# EAGLE board PGA44DIP44 (EAGLE 8.1.1)
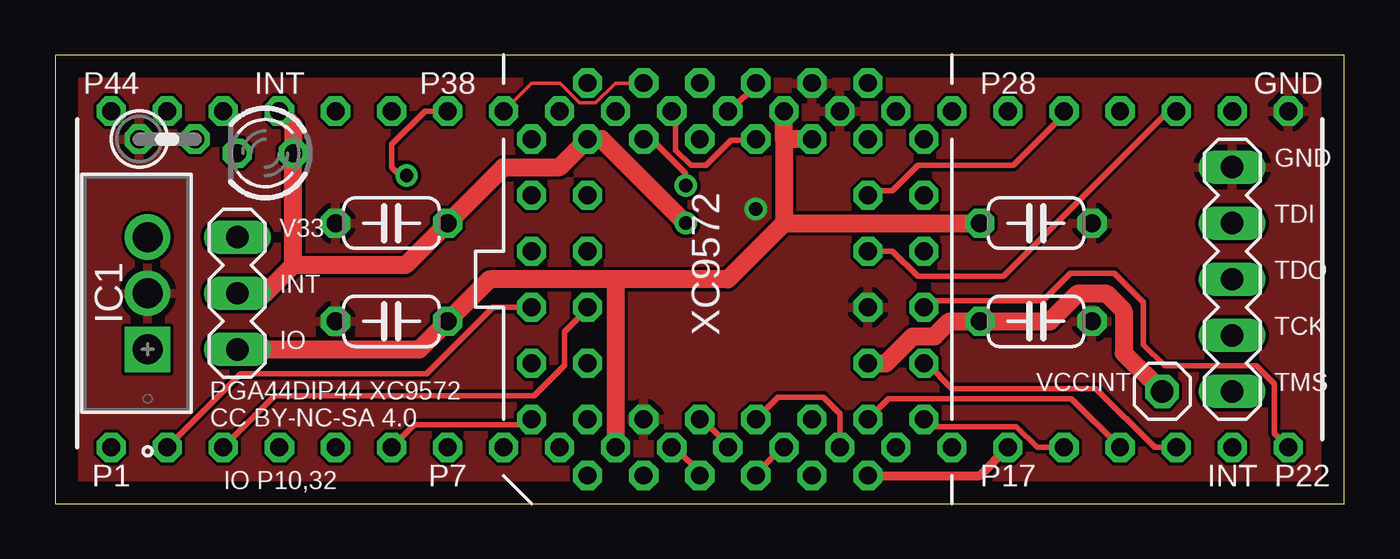
[diagram p0: board, top side]
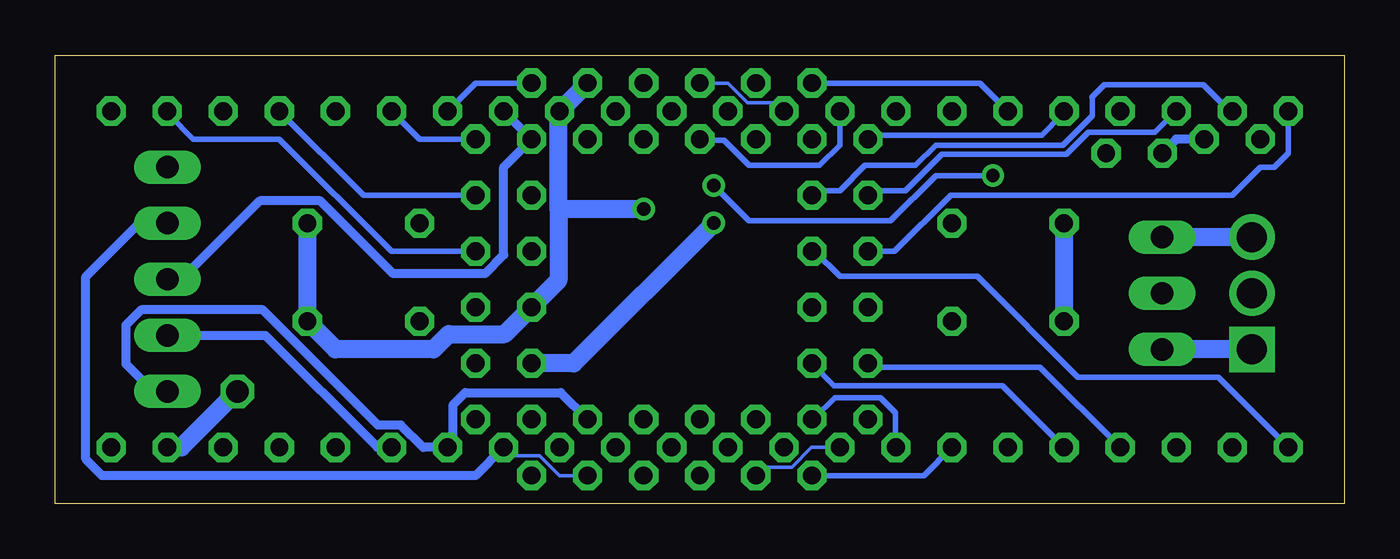
[diagram p1: board, bottom side, seen from below]

Size 58.42 x 20.31 mm. Coordinates in mm from the lower left corner, seen from the top.
Outline: 0,0 58.42,0 58.42,20.31 0,20.31 0,0
Copper layers (1*16): Top 0.035mm / dielectric 1.5mm / Bottom 0.035mm
Design rules "default *": minimum track width 6mil, minimum drill 24mil, track to track 6mil, track to pad 6mil, pad to pad 6mil, via to via 6mil, smd to smd 8mil, copper to edge 40mil, drill to drill 8mil, minimum pad ring 10mil, minimum via ring 8mil, stop-mask expansion 4mil, vias tented up to drill 0mil, thermal gap 10mil

## Footprints (pad centres in the part's own frame; a part is rotated, then mirrored left to right if it is on the bottom)
C050-024X044 = drill 0.813 octagon: 1 -2.54,0; 2 2.54,0
MA05-1 = drill 1.016 long: 1 -5.08,0; 2 -2.54,0; 3 0,0; 4 2.54,0; 5 5.08,0
DIP44 = drill 0.813 octagon: 1 -26.67,-8.89; 2 -24.13,-8.89; 3 -21.59,-8.89; 4 -19.05,-8.89; 5 -16.51,-8.89; 6 -13.97,-8.89; 7 -11.43,-8.89; 8 -8.89,-8.89; 9 -6.35,-8.89; 10 -3.81,-8.89; 11 -1.27,-8.89; 12 1.27,-8.89; 13 3.81,-8.89; 14 6.35,-8.89; 15 8.89,-8.89; 16 11.43,-8.89; 17 13.97,-8.89; 18 16.51,-8.89; 19 19.05,-8.89; 20 21.59,-8.89; 21 24.13,-8.89; 22 26.67,-8.89; 23 26.67,6.35; 24 24.13,6.35; 25 21.59,6.35; 26 19.05,6.35; 27 16.51,6.35; 28 13.97,6.35; 29 11.43,6.35; 30 8.89,6.35; 31 6.35,6.35; 32 3.81,6.35; 33 1.27,6.35; 34 -1.27,6.35; 35 -3.81,6.35; 36 -6.35,6.35; 37 -8.89,6.35; 38 -11.43,6.35; 39 -13.97,6.35; 40 -16.51,6.35; 41 -19.05,6.35; 42 -21.59,6.35; 43 -24.13,6.35; 44 -26.67,6.35
T03B = drill 1.372 pad 1.88 square: 1 -5.08,-1.016 | drill 1.372 pad 1.88: 2 -2.54,-1.016; 3 0,-1.016
MA03-1 = drill 1.016 long: 1 -2.54,0; 2 0,0; 3 2.54,0
1X01 = drill 1.016 octagon: 1 0,0
LED3MM = drill 0.813 octagon: A -1.27,0; K 1.27,0
0207/2V = drill 0.813 octagon: 1 -1.27,0; 2 1.27,0
PGA44 = drill 0.813 octagon: 1 1.27,6.35; 2 -1.27,8.89; 3 -1.27,6.35; 4 -3.81,8.89; 5 -3.81,6.35; 6 -6.35,8.89; 7 -8.89,6.35; 8 -6.35,6.35; 9 -8.89,3.81; 10 -6.35,3.81; 11 -8.89,1.27; 12 -6.35,1.27; 13 -8.89,-1.27; 14 -6.35,-1.27; 15 -8.89,-3.81; 16 -6.35,-3.81; 17 -8.89,-6.35; 18 -6.35,-8.89; 19 -6.35,-6.35; 20 -3.81,-8.89; 21 -3.81,-6.35; 22 -1.27,-8.89; 23 -1.27,-6.35; 24 1.27,-8.89; 25 1.27,-6.35; 26 3.81,-8.89; 27 3.81,-6.35; 28 6.35,-8.89; 29 8.89,-6.35; 30 6.35,-6.35; 31 8.89,-3.81; 32 6.35,-3.81; 33 8.89,-1.27; 34 6.35,-1.27; 35 8.89,1.27; 36 6.35,1.27; 37 8.89,3.81; 38 6.35,3.81; 39 8.89,6.35; 40 6.35,8.89; 41 6.35,6.35; 42 3.81,8.89; 43 3.81,6.35; 44 1.27,8.89

## Placement (x,y rotation side)
C1  0.1uF  [C050-024X044]  15.24,8.26 180 top
C2  0.1uF  [C050-024X044]  44.45,12.7 0 top
C3  0.1uF  [C050-024X044]  44.45,8.26 0 top
C4  0.1uF  [C050-024X044]  15.24,12.7 180 top
CN1  JTAG  [MA05-1]  53.34,10.16 90 top
DIP44  [DIP44]  29.21,11.43 0 top
IC1  LM2937ET-3.3/NOPB  [T03B]  3.17,12.07 90 top
JP1  PCONF  [MA03-1]  8.25,9.53 90 top
JP2  VCCINT  [1X01]  50.16,5.08 0 top
LED1  TLLR4400  [LED3MM]  9.52,15.88 180 top
R1  1K  [0207/2V]  5.08,16.51 0 top
XC9572  PGA44  [PGA44]  30.48,10.16 90 top

## Library data of the parts
C1-C4 = rcl
CN1 JP1 = PGA44DIP44; OC_FARNELL: unknown; OC_NEWARK: unknown
DIP44 JP2 R1 XC9572 = PGA44DIP44
IC1 = PGA44DIP44; MANUFACTURER_PART_NUMBER: lm2937et3_3nopb; VENDOR: National Semiconductor
LED1 = PGA44DIP44; MF: VISHAY SEMICONDUCTOR; OC_FARNELL: 1612437

## Nets
GND: C1.2 C2.2 C3.2 C4.2 CN1.5 DIP44.23 DIP44.31 IC1.2 R1.1 XC9572.10 XC9572.23 XC9572.31
L1: DIP44.1 XC9572.1
L2: DIP44.2 XC9572.2
L3: DIP44.3 XC9572.3
L4: DIP44.4 XC9572.4
L5: DIP44.5 XC9572.5
L6: DIP44.6 XC9572.6
L7: DIP44.7 XC9572.7
L8: DIP44.8 XC9572.8
L9: DIP44.9 XC9572.9
L11: DIP44.11 XC9572.11
L12: DIP44.12 XC9572.12
L13: DIP44.13 XC9572.13
L14: DIP44.14 XC9572.14
L18: DIP44.18 XC9572.18
L19: DIP44.19 XC9572.19
L20: DIP44.20 XC9572.20
L22: DIP44.22 XC9572.22
L24: DIP44.24 XC9572.24
L25: DIP44.25 XC9572.25
L26: DIP44.26 XC9572.26
L27: DIP44.27 XC9572.27
L28: DIP44.28 XC9572.28
L29: DIP44.29 XC9572.29
L33: DIP44.33 XC9572.33
L34: DIP44.34 XC9572.34
L35: DIP44.35 XC9572.35
L36: DIP44.36 XC9572.36
L37: DIP44.37 XC9572.37
L38: DIP44.38 XC9572.38
L39: DIP44.39 XC9572.39
L40: DIP44.40 XC9572.40
L42: DIP44.42 XC9572.42
L43: DIP44.43 XC9572.43
L44: DIP44.44 XC9572.44
N$1: LED1.K R1.2
TCK: CN1.2 DIP44.17 XC9572.17
TDI: CN1.4 DIP44.15 XC9572.15
TDO: CN1.3 DIP44.30 XC9572.30
TMS: CN1.1 DIP44.16 XC9572.16
V33: IC1.3 JP1.3
VCCINT: C3.1 C4.1 DIP44.21 DIP44.41 JP1.2 JP2.1 LED1.A XC9572.21 XC9572.41
VCCIO: C1.1 C2.1 DIP44.10 DIP44.32 IC1.1 JP1.1 XC9572.32

## Tracks (layer width: path | path; a pad name or v marks a point on that pad's centre or on a via)
GND  (via drill 0.61)
  Bottom 0.813: C2.2 C3.2 45.72,6.99 41.27,6.99 40.59,7.67 38.05,7.67 XC9572.23 35.61,10.11 35.61,13.34 | 35.61,13.34 35.61,17.73 DIP44.31 34.45,18.89 | v31.75,13.34 35.61,13.34 | C4.2 C1.2
  pour Top: 0.63,19.69 57.78,19.69 57.78,0.64 0.63,0.64
  pour Top: 0.63,19.69 57.78,19.69 57.78,0.64 0.63,0.64
L1
  Bottom 0.254: XC9572.1 24,11.43 22.86,10.29 16.64,10.29 12.06,5.72 5.71,5.72 DIP44.1
L2
  Top 0.254: 20.95,8.89 XC9572.2 19.85,8.89 16.83,5.87 8.41,5.87 DIP44.2
L3
  Top 0.254: XC9572.3 24.13,8.81 23.09,7.77 23.09,6.26 21.71,4.88 9.96,4.88 DIP44.3
L4
  Bottom 0.254: XC9572.4 21.49,6.17 13.79,6.17 DIP44.4
L5
  Bottom 0.254: XC9572.5 23.12,5.34 15.5,5.34 DIP44.5
L6
  Top 0.254: DIP44.6 16.27,3.57 21.35,3.57 XC9572.6
L7
  Bottom 0.254: DIP44.7 19.05,1.27 XC9572.7
L8
  Bottom 0.254: DIP44.8 20.34,2.74 20.34,4.12 21.03,4.8 23.09,4.8 24,3.89 XC9572.8
L9
  Bottom 0.152: DIP44.9 24.14,2.54 25.03,1.65 26.29,1.65 XC9572.9
L11
  Top 0.254: DIP44.11 28.12,2.52 29.26,1.37 XC9572.11
L12
  Top 0.254: DIP44.12 30.4,2.74 29.26,3.89 XC9572.12
L13
  Top 0.254: XC9572.13 31.77,1.37 32.92,2.52 DIP44.13
L14
  Top 0.254: XC9572.14 32.75,4.81 34.83,4.81 35.56,4.07 DIP44.14
L18
  Top 0.254: XC9572.18 39.7,3.48 43.57,3.48 44.51,2.54 DIP44.18
L19
  Top 0.254: DIP44.19 46.05,4.75 37.77,4.75 XC9572.19
L20
  Top 0.254: XC9572.20 39.5,6.35 40.64,5.21 47.15,5.21 49.82,2.54 DIP44.20
L22
  Top 0.254: DIP44.22 55.24,3.18 55.24,5.42 54.42,6.24 50.27,6.24 49.32,7.2 49.32,9.11 47.99,10.44 46,10.44 44.75,9.2 40.64,9.2 | 40.5,9.2 40.64,9.2 | 40.64,9.2 39.67,9.2 XC9572.22
L24
  Bottom 0.254: DIP44.24 53.26,17.6 52.17,16.51 48.26,16.51 43.18,11.43 XC9572.24
L25
  Top 0.254: XC9572.25 37.95,11.43 39.09,10.29 42.98,10.29 50.29,17.6 50.75,17.6 DIP44.25
L26
  Bottom 0.254: XC9572.26 44.45,13.97 DIP44.26
L27
  Top 0.254: XC9572.27 37.03,14.17 37.95,14.17 39.09,15.32 43.43,15.32 45.72,17.6 DIP44.27
L28
  Bottom 0.254: XC9572.28 41.91,16.51 DIP44.28
L29
  Bottom 0.254: XC9572.29 39.37,19.05 DIP44.29
L33
  Top 0.254: DIP44.33 30.63,17.83 31.77,18.97 XC9572.33
L34
  Top 0.254: XC9572.34 31.55,16.46 30.63,16.46 29.49,15.32 28.8,15.32 28.12,16 28.12,17.6 DIP44.34
L35
  Bottom 0.152: XC9572.35 27.93,19.05 27.04,18.16 25.78,18.16 DIP44.35
L36
  Bottom 0.254: DIP44.36 22.86,16.23 23.77,15.32 26.97,15.32 28.12,16.46 29.03,16.46 XC9572.36
L37
  Top 0.152: DIP44.37 21.59,19.05 22.87,19.05 23.76,18.16 24.5,18.16 25.39,19.05 XC9572.37
L38  (via drill 0.61)
  Top 0.254: v15.93,14.86 15.62,14.86 15.24,15.24 15.24,16.27 16.75,17.78 DIP44.38 | v28.57,14.4 28.57,14.97 27.03,16.51 XC9572.38
  Bottom 0.254: v15.93,14.86 18.52,14.86 20.57,12.8 26.97,12.8 v28.57,14.4
L39
  Bottom 0.254: DIP44.39 16.51,19.05 XC9572.39
L40
  Bottom 0.254: XC9572.40 21.49,16.69 13.72,16.69 12.8,17.6 DIP44.40
L42
  Bottom 0.254: XC9572.42 21.49,14.17 19.89,14.17 18.24,15.82 12.6,15.82 11.61,16.82 8.58,16.82 DIP44.42
L43
  Bottom 0.254: XC9572.43 24,14.17 22.86,14.17 21.72,15.32 19.43,15.32 18.52,16.23 12.76,16.23 11.43,17.57 11.43,18.41 11.43,18.42 10.87,18.97 6.4,18.97 5.26,17.83 DIP44.43
L44
  Bottom 0.254: XC9572.44 20.38,11.43 17.84,13.97 5.08,13.97 3.81,15.24 3.17,15.24 2.54,15.88 DIP44.44
N$1
  Bottom 0.406: R1.2 7.62,16.51 LED1.K
TCK
  Top 0.406: XC9572.17 41.91,1.27 DIP44.17
  Bottom 0.406: CN1.2 48.89,7.62 43.81,2.54 DIP44.17
TDI
  Bottom 0.152: XC9572.15 35.57,1.27 36.46,2.16 37.72,2.16 DIP44.15
  Bottom 0.406: DIP44.15 39.37,1.27 56.29,1.27 57.03,2.01 57.03,10.28 54.61,12.7 CN1.4
TDO
  Bottom 0.406: DIP44.30 XC9572.30 38.1,15.24 38.1,11.26 38.95,10.41 43.1,10.41 46.41,13.72 49.15,13.72 52.7,10.16 CN1.3
TMS
  Bottom 0.406: CN1.1 53.97,5.08 55.22,6.33 55.22,8.08 54.53,8.78 49.01,8.78 43.79,3.56 42.76,3.56 41.74,2.54 DIP44.16 40.39,2.79 40.39,4.48 39.83,5.03 35.51,5.03 XC9572.16
V33
  Bottom 0.813: IC1.3 JP1.3
VCCINT  (via drill 0.61)
  Top 0.813: v28.57,12.7 24.76,16.51 XC9572.41 22.86,15.24 20.32,15.24 C4.1 15.87,10.8 10.79,10.8 | JP2.1 48.43,6.82 48.43,8.72 47.62,9.53 46.35,9.53 45.08,8.26 C3.1 40.53,8.26 39.84,7.57 38.86,7.57 37.65,6.35 XC9572.21 | 10.79,10.8 LED1.A 10.79,17.15 DIP44.41 | JP1.2 9.52,9.53 10.79,10.8
  Bottom 0.813: v28.57,12.7 34.92,6.35 XC9572.21 | JP2.1 52.7,2.54 DIP44.21
VCCIO
  Top 0.813: 33.02,12.7 30.48,10.16 25.4,10.16 | 33.02,16.51 33.02,12.7 | 33.02,16.51 DIP44.32 | 33.02,12.7 C2.1 | JP1.1 16.51,6.99 C1.1 19.68,10.16 25.4,10.16 | XC9572.32 33.02,16.51 | 25.4,10.16 DIP44.10
  Bottom 0.813: IC1.1 JP1.1

## Text on the board
tNames: P44 | INT | P38 | P28 | GND | GND | TDI | V33 | INT | TDO | TCK | IO | VCCINT | TMS | PGA44DIP44 XC9572 / CC BY-NC-SA 4.0 | P1 | IO P10,32 | P7 | P17 | INT | P22